# Altium PCB Player.PcbDoc (part 5 of 6)
Units mil, origin at the board's own origin, x right, y up, seen from the top; angles counter-clockwise.
Board outline 2992.13 x 3937.01 mil, 6 copper layers (Top Layer, Mid-Layer 1, Mid-Layer 2, Mid-Layer 3, Mid-Layer 4, Bottom Layer), stack 60.567 mil thick; 284 components, 323 nets, 1590 pads, 1045 vias.
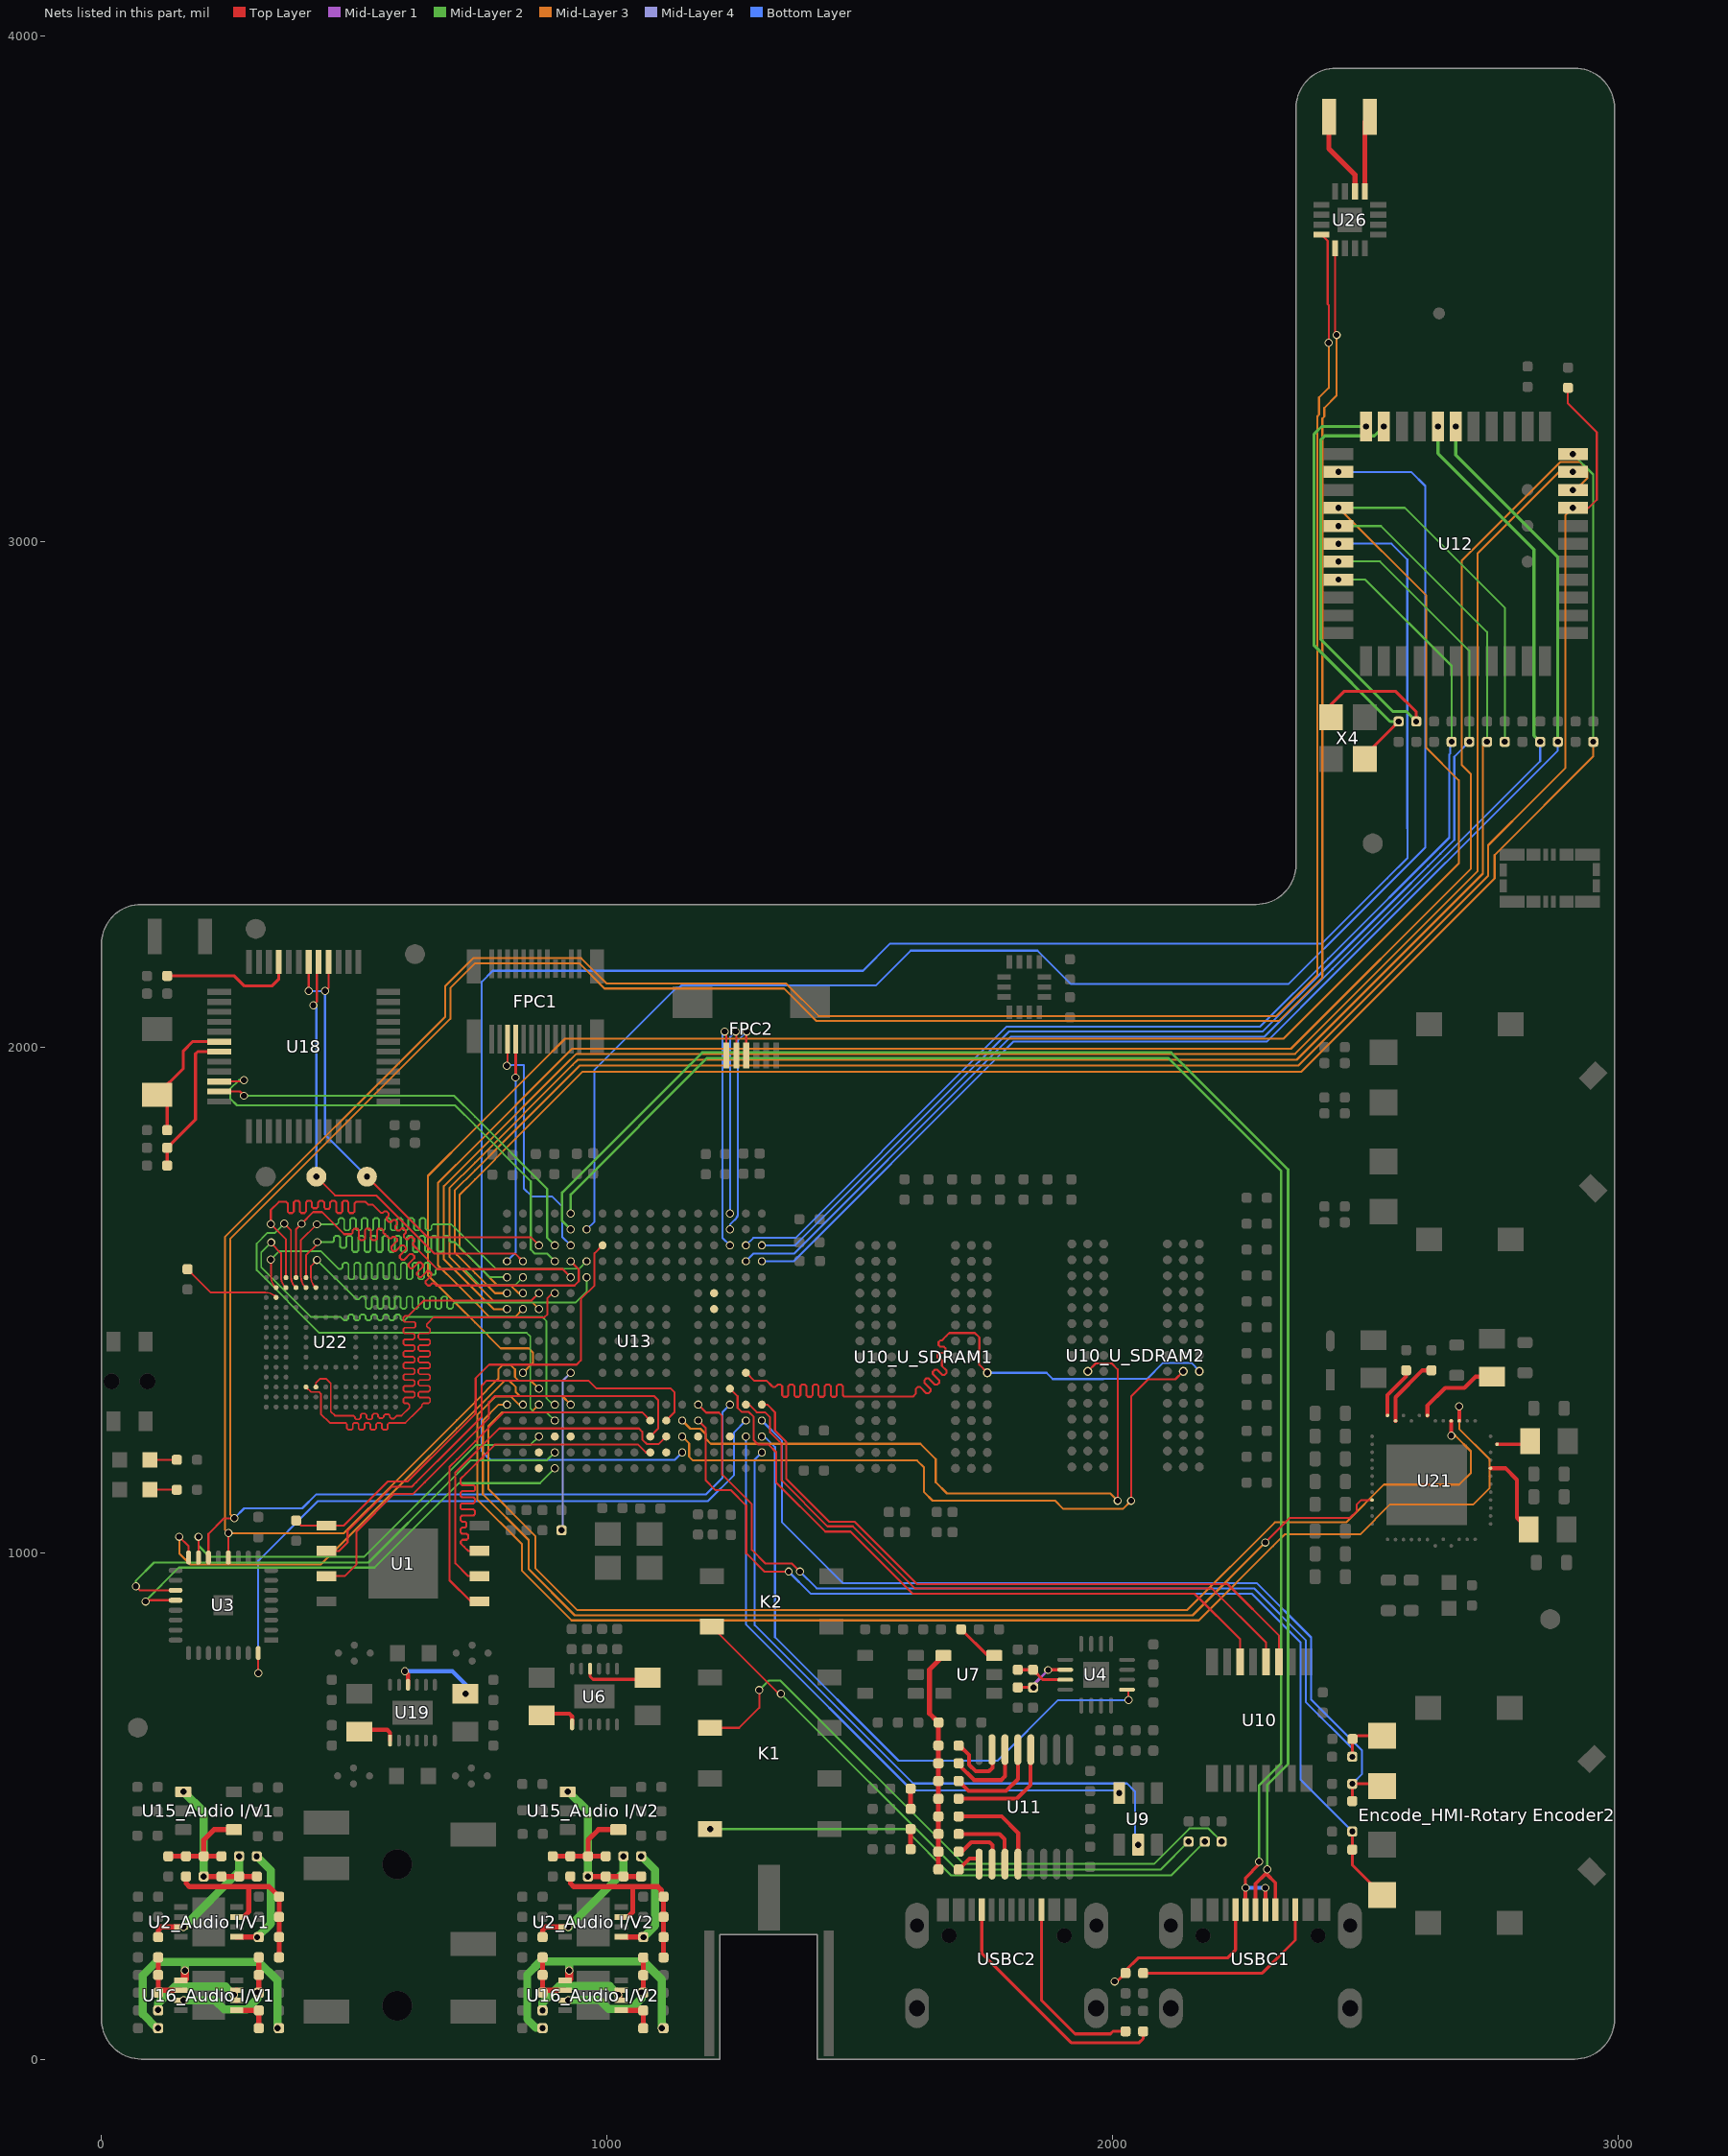
[diagram p9: the nets of this part, all layers, seen from the top]

## Via types
v1: diameter 16, hole 12, Top Layer to Bottom Layer, tented both sides, 1045 vias

## Nets (pads, with @x,y where several pads share a name; then routed paths per layer and width w, separated by ;. In a path a pad name is that pad's centre, name@x,y a point inside that pad or via, vN(x,y) a via of type N, cw(c..) or ccw(c..) an arc to the next point about the centre after c; other vN are vias at no path point) (continued)
NetC66_1: C66.1 U12.10 X4.1 | length 1027.1
  Top Layer w6: X4.1@2431.54,2653.35 2431.54,2678.54 2458,2705 2558.85,2705 2600,2663.85 v1(2600,2645)
  Mid-Layer 2 w6: v1(2536,3228.45) 2517.34,3209.79 2418.84,3209.79 2411.31,3202.26 2411.31,2807.06 2553.37,2665 2580,2665 v1(2600,2645)
NetC67_1: C67.1 U12.11 X4.3 | length 858.4
  Top Layer w6: X4.3@2498.46,2570.67 2498.46,2578.46 v1(2565,2645)
  Mid-Layer 2 w6: v1(2501,3228.45) 2413,3228.45 2398.05,3213.5 2398.05,2795.43 2548.48,2645 v1(2565,2645)
NetC70_2: C70.2 U18.6 X3.1 | length 264.9
  Top Layer w6: C70.2@130,1837.01 130,1887.05 X3.1@110,1907.05 162,1959.05 162,1994 179.85,2011.85 U18.6@232.68,2011.85
NetC71_1: C71.1 R8.2 U18.7 | length 292.6
  Top Layer w6: R8.2@130,1767.01 C71.1@130,1802.01 186,1858.01 186,1988 190.17,1992.17 U18.7@232.68,1992.17
"NetC74_Audio I/V1_1": "C74_Audio I/V1.1" "R24_Audio I/V1.2" "R25_Audio I/V1.2" "R27_Audio I/V1.1" "U15_Audio I/V1.4" | length 205.6
  Top Layer w10: 132.28,401.18 167.28,401.18 202.28,401.18 ; 237.28,401.18 202.28,401.18 ; 262.2,453.6 262.02,453.78 222.78,453.78 202.28,433.28 202.28,401.18
"NetC74_Audio I/V1_2": "C74_Audio I/V1.2" "R19_Audio I/V1.1" "R24_Audio I/V1.1" "R36_Audio I/V1.1" "U15_Audio I/V1.1" | length 290.6
  Top Layer w10: v1@202.28,361.18 307.28,361.18
  Mid-Layer 2 w16: v1(162,529) 202,489 v1@202,360
  other v1: 202,361
"NetC74_Audio I/V2_1": "C74_Audio I/V2.1" "R24_Audio I/V2.2" "R25_Audio I/V2.2" "R27_Audio I/V2.1" "U15_Audio I/V2.4" | length 205.6
  Top Layer w10: 892.28,401.18 927.28,401.18 962.28,401.18 ; 997.28,401.18 962.28,401.18 ; 1022.2,453.6 1022.02,453.78 982.78,453.78 962.28,433.28 962.28,401.18
"NetC74_Audio I/V2_2": "C74_Audio I/V2.2" "R19_Audio I/V2.1" "R24_Audio I/V2.1" "R36_Audio I/V2.1" "U15_Audio I/V2.1" | length 290.6
  Top Layer w10: v1@962.28,361.18 1067.28,361.18
  Mid-Layer 2 w16: v1@922,530 962,490 v1(962,361)
  other v1: 922,529
"NetC75_Audio I/V1_2": "C75_Audio I/V1.2" "R27_Audio I/V1.2" "R34_Audio I/V1.2" "R37_Audio I/V1.1" "R63_Audio I/V1.1" "U2_Audio I/V1.7" | length 406
  Top Layer w10: 167.28,361.18 167.28,347.72 174.14,340.86 299.9,340.86 300.03,340.98 331.48,340.98 351.28,321.18 351.28,241.18 351.28,201.18 ; 267.69,281.02 281.02,281.02 291.24,291.24 291.24,340.86
"NetC75_Audio I/V2_2": "C75_Audio I/V2.2" "R27_Audio I/V2.2" "R34_Audio I/V2.2" "R37_Audio I/V2.1" "R63_Audio I/V2.1" "U2_Audio I/V2.7" | length 412.7
  Top Layer w10: 927.28,361.18 927.28,347.72 934.14,340.86 1050.77,340.86 ; 1027.69,281.02 1041.02,281.02 1050.77,290.77 1050.77,340.86 ; 1107.28,321.04 1111.49,316.83 1111.49,241.04 1111.49,201.04 ; 1111.49,321.04 1107.28,325.25 1107.28,333.81 1100.24,340.86 1050.77,340.86
"NetC76_Audio I/V1_2": "C76_Audio I/V1.2" "R55_Audio I/V1.2" "R56_Audio I/V1.1" "U16_Audio I/V1.2" | length 116.6
  Top Layer w10: 112.28,201.18 112.28,166.18 112.28,131.18 117.12,136.02 156.87,136.02
"NetC76_Audio I/V2_2": "C76_Audio I/V2.2" "R55_Audio I/V2.2" "R56_Audio I/V2.1" "U16_Audio I/V2.2" | length 116.6
  Top Layer w10: 872.28,201.18 872.28,166.18 872.28,131.18 877.12,136.02 916.87,136.02
"NetC77_Audio I/V1_2": "C77_Audio I/V1.2" "R60_Audio I/V1.2" "U16_Audio I/V1.5" | length 78.8
  Top Layer w10: 267.69,96.65 267.93,96.42 311.05,96.42 311.28,96.18 311.28,61.18
"NetC77_Audio I/V2_2": "C77_Audio I/V2.2" "R60_Audio I/V2.2" "U16_Audio I/V2.5" | length 79
  Top Layer w10: 1027.69,96.65 1028,96.35 1071.18,96.35 1071.49,96.04 1071.49,61.04
"NetC78_Audio I/V1_2": "C78_Audio I/V1.2" "R63_Audio I/V1.2" "R65_Audio I/V1.1" "U16_Audio I/V1.3" | length 245.4
  Top Layer w10: v1(308,132) 311.28,135.28 311.28,166.18 311.28,201.18
  Mid-Layer 2 w16: v1(162.41,116.24) 224.76,116.24 243,98 286.99,98 308,119.01 v1(308,132)
"NetC78_Audio I/V2_2": "C78_Audio I/V2.2" "R63_Audio I/V2.2" "R65_Audio I/V2.1" "U16_Audio I/V2.3" | length 245.6
  Top Layer w10: v1(1068,132) 1071.49,135.49 1071.49,166.04 1071.49,201.04
  Mid-Layer 2 w16: v1(923.35,116.16) 924.47,115.04 926.43,117 985,117 1003,99 1046.99,99 1068,120.01 v1@1068,133
NetC95_1: C95.1 U22.C2 | length 197.6
  Top Layer w3.5: C95.1@170,1562.01 216.08,1515.93 324.21,1515.93 cw(c324.21,1486.85) 344.77,1507.41 U22.C2@345.32,1506.08
NetK1_2: K1.2 R59.2 | length 1260
  Top Layer w4: K1.2@1203.78,655 1261,655 1300.86,694.86 v1(1300.86,729.63)
  Mid-Layer 2 w4: v1(1300.86,729.63) 1319.84,748.62 1342.63,748.62 1704.84,386.41 2082.04,386.41 2151.63,456 2189,456 v1(2215,430)
NetK1_4: K1.4 R38.2 | length 1043.7
  Mid-Layer 2 w4: v1(1203.78,455) 1588.72,455 1680.29,363.43 2115.44,363.43 v1(2182.01,430)
NetK2_2: K2.2 R41.2 | length 1164.9
  Top Layer w4: K2.2@1206.89,855 1339.39,722.5 v1(1343.67,722.5)
  Mid-Layer 2 w4: v1(1343.67,722.5) 1691.34,374.83 2094.83,374.83 v1(2150,430)
NetL1_1: L1.1 U21.20 | length 169.8
  Top Layer w8: U21.20@2747.01,1168.5 2776.12,1168.5 2799,1145.62 2799,1070.41 L1.1@2822.4,1047.01
NetL2_1: L2.1 U21.23 | length 67.8
  Top Layer w6: U21.23@2759.8,1215.75 2818.74,1215.75 L2.1@2825,1222.01
NetL3_1: L3.1 U21.31 | length 171
  Top Layer w8: U21.31@2622.01,1272.83 2622.01,1292.01 2657.26,1327.26 2695.26,1327.26 2717.61,1349.61 L3.1@2750,1349.61
NetL4_1: L4.1 U19.1 | length 80.3
  Top Layer w8: L4.1@510,647.6 513.58,651.18 565.24,651.18 570.71,645.71 U19.1@570.71,629.88
NetL6_1: L6.1 U6.1 | length 80.3
  Top Layer w8: L6.1@870,679.61 873.58,683.19 925.24,683.19 930.71,677.72 U6.1@930.71,661.89
NetL7_1: L7.1 U6.10 | length 132.9
  Top Layer w6: U6.10@966.14,772.13 966.14,756.86 971.98,751.02 1076.61,751.02 L7.1@1080,754.41
NetL8_1: L8.1 U19.10 | length 178.8
  Top Layer w8: v1(600,767) 606.14,760.86 U19.10@606.14,740.12
  Bottom Layer w8: v1(600,767) 694,767 720,741 v1(720,722.4)
NetLED1_2: LED1.2 R10.2 | length 53
  Top Layer w4: LED1.2@96,1185 137.72,1185 R10.2@149,1185
NetLED2_2: LED2.2 R9.2 | length 53
  Top Layer w4: LED2.2@96,1126 R9.2@149,1126
NetR4_2: R4.2 U18.45 | length 268.3
  Top Layer w6: R4.2@130,2142.01 262.99,2142.01 283,2122 337,2122 350.79,2135.79 U18.45@350.79,2169.33
NetR11_1: R11.1 USBC1.A5 | length 347.2
  Top Layer w6: v1(2003.6,153.64) 2008.64,153.64 R11.1@2025,170 2025,175.04 2049.96,200 2226.54,200 2242.72,216.18 USBC1.A5@2242.72,295.45
NetR12_2: R12.2 U21.35 | length 139.8
  Top Layer w8: U21.35@2559.02,1262.01 2559.02,1308.75 2612.28,1362.01 R12.2@2630,1362.01
NetR13_2: R13.2 U21.36 | length 104.3
  Top Layer w8: U21.36@2543,1273 2543,1313 2580,1350 R13.2@2580,1362.01
NetR14_1: R14.1 USBC1.B5 | length 388
  Top Layer w6: R14.1@2060,170 2295.51,170 2360.82,235.31 USBC1.B5@2360.82,295.44
NetR15_1: R15.1 USBC2.A5 | length 496.4
  Top Layer w6: USBC2.A5@1740.79,295.45 1740.79,209.21 1917.51,32.49 2051.87,32.49 2060,40.62 R15.1@2060,55
NetR16_1: R16.1 USBC2.B5 | length 375.1
  Top Layer w6: USBC2.B5@1858.9,295.44 1858.9,116.1 1925.25,49.75 1995.02,49.75 2000.26,55 R16.1@2025,55
"NetR19_Audio I/V1_2": "R19_Audio I/V1.2" "R20_Audio I/V1.2" "U2_Audio I/V1.3" | length 246.1
  Top Layer w10: 112.28,241.18 112.28,254.89 118.73,261.34 v1@156.87,261.34
  Mid-Layer 2 w16: v1(162.24,261.45) 162.45,261.45 272,371 v1(272,401)
"NetR19_Audio I/V2_2": "R19_Audio I/V2.2" "R20_Audio I/V2.2" "U2_Audio I/V2.3" | length 247.9
  Top Layer w10: 872.28,241.18 872.28,254.89 878.73,261.34 v1@916.87,261.34
  Mid-Layer 2 w16: v1(923.21,261.16) 923.74,260.64 1032,368.89 v1@1032,402
  other v1: 1032,401
NetR26_2: R26.2 R50.1 U4.3 | length 102.2
  Top Layer w6: R50.1@1812.01,770 R26.2@1842.01,770 1861.85,750.16 U4.3@1905.98,750.16
NetR28_1: R28.1 R29.2 R30.2 R31.2 R32.2 R40.2 R42.2 R43.2 R44.2 U7.4 | length 435.8
  Top Layer w10: R28.1@1653,668 1637.49,683.51 1637.49,770.48 U7.4@1665,797.99 ; R44.2@1655,375 R31.2@1655,585 R32.2@1655,620 R28.1@1655,663
NetR29_1: R29.1 U11.4 | length 226.2
  Top Layer w8: R29.1@1695,515 1810,515 1837,542 U11.4@1837,615
NetR30_1: R30.1 U11.5 | length 193.7
  Top Layer w8: R30.1@1695,550 1714.93,530.07 1788.61,530.07 1812.21,553.66 U11.5@1812.21,612.09
NetR31_1: R31.1 U11.6 | length 162.9
  Top Layer w8: R31.1@1695,585 1695,582.63 1725.84,551.79 1779.34,551.79 1787,559.45 U11.6@1787,612
NetR32_1: R32.1 U11.7 | length 132.3
  Top Layer w8: R32.1@1695,620 1697,620 1715.68,601.32 1715.68,582.09 1728.78,569 1755,569 1762,576 U11.7@1762,606
"NetR34_Audio I/V1_1": "R34_Audio I/V1.1" "R36_Audio I/V1.2" "U2_Audio I/V1.5" | length 223.4
  Top Layer w10: 267.69,241.65 306.81,241.65 307.28,241.18 307.82,241.18 v1(308,241)
  Mid-Layer 2 w16: v1(307,401) 335,373 335,268 v1(308,241)
"NetR34_Audio I/V2_1": "R34_Audio I/V2.1" "R36_Audio I/V2.2" "U2_Audio I/V2.5" | length 226.8
  Top Layer w10: 1027.69,241.65 1028,241.35 1071.18,241.35 1071.49,241.04 1071.89,241.04 v1(1071.98,240.95)
  Mid-Layer 2 w16: v1@1067,402 1095,374 1095,263.97 v1(1071.98,240.95)
  other v1: 1067,401
NetR39_1: R39.1 R58.2 | length 40
  Top Layer w10: R39.1@1600,415 R58.2@1600,455
NetR40_1: R40.1 U11.12 | length 182.7
  Top Layer w8: R40.1@1695,480 1780,480 1813,447 U11.12@1813,396
NetR42_1: R42.1 U11.11 | length 134.1
  Top Layer w8: R42.1@1695,445 1776,445 1786,435 U11.11@1786,396
NetR43_1: R43.1 U11.10 | length 105.4
  Top Layer w8: R43.1@1695,410 1701,410 1720,429 1756,429 1762,423 U11.10@1762,395
NetR44_1: R44.1 U11.9 | length 58.3
  Top Layer w8: R44.1@1695,375 1716.47,396.47 1732.4,396.47 1735.43,393.43 U11.9@1735.43,385.71
NetR45_1: R45.1 U7.3 | length 86.9
  Top Layer w6: R45.1@1700,850 1752.01,797.99 U7.3@1765.39,797.99
NetR51_1: R51.1 R52.2 U4.2 | length 110.5
  Top Layer w6: R51.1@1812.01,735 R52.2@1842.01,735 ; v1(1872.13,769.41) 1872.57,769.84 U4.2@1905.98,769.84
  Mid-Layer 1 w6: v1(1843,735) 1843,740.27 v1(1872.13,769.41)
"NetR57_Audio I/V1_1": "R57_Audio I/V1.1" "R60_Audio I/V1.1" "U16_Audio I/V1.1" | length 539.9
  Top Layer w16: 164.72,158.51 165,158.79 v1(165,175)
  Mid-Layer 2 w16: v1(112,61) 109.9,61 82,88.9 82,166 108,192 312,192 348,156 v1@348,60 ; v1(165,175) 165,192
  other v1: 348,61
"NetR57_Audio I/V2_1": "R57_Audio I/V2.1" "R60_Audio I/V2.1" "U16_Audio I/V2.1" | length 546.3
  Top Layer w16: 924.72,158.51 925,158.79 v1(925,175)
  Mid-Layer 2 w16: v1@872,62 859,62 842,79 842,167 868,193 1072,193 1108,157 v1(1108,61) ; v1@925,176 925,193
  other v1: 872.28,61.18
"NetR61_Audio I/V1_2": "R61_Audio I/V1.2" "U16_Audio I/V1.6" "U16_Audio I/V1.7" | length 208.5
  Top Layer w10: 267.69,116.34 262,122.03 v1(262,127) 262,130.33 267.69,136.02
  Mid-Layer 2 w16: v1(112,97) 112,110.6 144.96,143.55 245.45,143.55 v1(262,127)
"NetR61_Audio I/V2_2": "R61_Audio I/V2.2" "U16_Audio I/V2.6" "U16_Audio I/V2.7" | length 203.8
  Top Layer w4: 1027.69,116.34 1027.69,136.02
  Mid-Layer 2 w16: v1@872,98 872,111.6 904.96,144.55 1005.45,144.55 v1@1022,128
  other v1: 872.28,96.18 1022,127
NetR62_1: R62.1 R64.2 | length 40
  Top Layer w10: R62.1@1600,495 R64.2@1600,535
NetSPK+_1: SPK+.1 U26.9 | length 152
  Top Layer w10: U26.9@2498.43,3693.27 2498.43,3830.91 SPK+.1@2508.58,3841.06
NetSPK-_1: SPK-.1 U26.10 | length 169.1
  Top Layer w10: SPK-.1@2427.32,3841.06 2427.32,3777.68 2478.74,3726.26 U26.10@2478.74,3693.27
PA0: "C1_HMI-Rotary Encoder2.1" "Encode_HMI-Rotary Encoder2.A" "R12_HMI-Rotary Encoder2.1" U13.N5 | length 1882.3
  Top Layer w4: v1(1179.92,1294.17) 1195.7,1278.39 1220.89,1278.39 1227.45,1271.83 1227.45,1155.89 1286.23,1097.11 1286.23,1006.77 1312.94,980.06 1364.94,980.06 v1(1381,964)
  Top Layer w6: v1(2473.64,597.8) 2473.86,598.01 2473.86,632.77 2474.08,632.98 2475.7,631.36 2483.83,639.49 2532.75,639.49
  Bottom Layer w4: v1(1381,964) 1414.16,930.84 2230.71,930.84 2279.16,930.84 2381.47,828.53 2381.47,706.53 2473.64,614.36 v1(2473.64,597.8)
PA1: "C2_HMI-Rotary Encoder2.1" "Encode_HMI-Rotary Encoder2.B" "R13_HMI-Rotary Encoder2.1" U13.N4 | length 2055.5
  Top Layer w4: v1(1179.92,1262.68) 1195,1247.6 1195,1144 1213.67,1125.33 1244.33,1125.33 1275.02,1094.64 1275.02,1000.27 1311.28,964 v1(1359,964)
  Top Layer w6: v1(2473.64,450) 2473.54,449.91 2473.54,414.35 2473.45,414.26 2473.64,414.07 2473.64,383.64 2532.75,324.53
  Bottom Layer w4: v1(1359,964) 1402.44,920.56 2230.71,920.56 2230.71,920.42 2274.58,920.42 2371.3,823.7 2371.3,552.34 v1(2473.64,450)
PA2: U13.N3
PA3: U9.5 U13.U2 | length 1343.4
  Bottom Layer w4: v1(1305.91,1199.68) 1292,1185.78 1292,858 1605,545 2028,545 2044,529 2044,429.82 v1(2050,423.82)
PA4: U4.9 U13.U3 | length 1282.2
  Top Layer w4: U4.9@2028.03,730.47 2031,727.5 v1(2031,710)
  Bottom Layer w4: v1(1305.91,1231.18) 1310.82,1231.18 1332,1210 1332,915 1332,834.16 1576.16,590 1772,590 1892,710 v1(2031,710)
PA5: U9.3 U13.T3 | length 1247.8
  Bottom Layer w4: v1(1274.41,1231.18) 1274.41,915 1274.41,859.74 1602.79,531.36 2007.42,531.36 v1(2012.6,526.18)
PA6: U13.R3
PA7: U3.14 U13.R5 U26.1 | length 5775.1
  Top Layer w4: U3.14@211.55,992.01 211.55,1038.55 242.47,1069.47 v1(262.64,1069.47) ; U26.1@2439.37,3581.06 2439.37,3412.52 v1(2442.44,3409.44)
  Mid-Layer 3 w4: v1(262.64,1069.47) 254.48,1077.62 254.48,1621.48 690,2057 690,2118.14 738.86,2167 944.7,2167 994.7,2117 1349.7,2117 1413.98,2052.72 2328.02,2052.72 2414.38,2139.08 2414.38,3244.19 2418.13,3247.93 2418.13,3264.9 2442.44,3289.22 v1(2442.44,3409.44)
  Bottom Layer w4: v1(262.64,1069.47) 282.17,1089 397.06,1089 425,1116.94 1195.94,1116.94 1228.13,1149.13 1228.13,1279.39 v1(1242.91,1294.17)
PA8: FPC1.3 U13.E15 | length 506.3
  Top Layer w4: v1(801.55,1964.35) 803.02,1965.83 803.27,1966.08 FPC1.3@803.27,2017.01
  Bottom Layer w4: v1(801.55,1964.35) 803.02,1965.83 803.19,1966 835,1966 835,1722 851,1706 891,1706 911,1686 911,1626.09 v1(927.95,1609.13)
PA9: U13.D15 U18.11 | length 846.4
  Top Layer w4: U18.11@232.68,1913.43 273.57,1913.43 v1(282,1905)
  Mid-Layer 2 w4: v1(282,1905) 697.2,1905 738.71,1863.49 881.38,1720.81 881.38,1624.21 v1(896.46,1609.13)
PA10: U13.D14 U18.10 | length 958.8
  Top Layer w4: U18.10@232.68,1933.11 279.11,1933.11 v1(282,1936)
  Mid-Layer 2 w4: v1(282,1936) 272,1936 254.51,1918.51 254.51,1899.49 268.08,1885.92 699.08,1885.92 738.71,1846.29 849.07,1735.93 849.07,1600.58 856.85,1592.8 881.3,1592.8 v1(896.46,1577.64)
PA11: U13.E17 USBC1.A7 USBC1.B7 | length 3219.6
  Top Layer w6: v1(2262.4,338.74) 2262.4,358.28 2289.44,385.33 v1(2289.44,390.56)
  Top Layer w7.28: USBC1.B7@2262.4,295.44 v1(2262.4,338.74) ; USBC1.A7@2301.77,295.38 v1(2301.77,338.74)
  Mid-Layer 2 w5: v1(927.95,1672.13) 927.95,1709.77 1197.91,1979.73 2109.27,1979.73 2123.17,1965.83 2230.71,1858.29 2332.9,1756.1 2332.9,584.9 2289.44,541.44 v1(2289.44,390.56)
  Bottom Layer w7.28: v1(2262.4,338.74) v1(2301.77,338.74)
PA12: U13.E16 USBC1.A6 USBC1.B6 | length 3288.9
  Top Layer w7.28: USBC1.A6@2282.08,295.44 2282.08,346.86 v1@2302.68,367.45 ; v1@2304.53,369.3 2304.53,365.59 2321.45,348.67 USBC1.B6@2321.45,295.44
  Mid-Layer 2 w5: v1(927.95,1640.63) 911,1657.58 911,1713.38 1163.44,1965.83 1188.35,1990.73 2114.96,1990.73 2139.86,1965.83 2230.71,1874.98 2346.53,1759.16 2346.53,583.35 2343.9,580.72 2343.9,580.35 2305,541.44 v1(2305,375)
PA13: TP2.1 U13.C15 U18.40 U18.42 | length 947.3
  Top Layer w4: U18.42@409.84,2169.33 409.84,2112.16 v1(410,2112) ; v1(442,2112) 449.21,2119.21 U18.40@449.21,2169.33 ; v1(525,1745) 564.17,1705.83 644.67,1625.33 702.72,1625.33 738.71,1625.33 848.77,1625.33 v1(864.96,1609.13)
  Bottom Layer w4: v1(410,2112) v1(442,2112) 442,1828 v1(525,1745)
PA14: TP3.1 U13.B14 U18.41 | length 909
  Top Layer w4: v1(419,2084) 426.06,2091.06 426.06,2165.87 U18.41@429.53,2169.33 ; v1(425,1745) 462,1708 543,1708 545.17,1705.83 657.99,1593.01 702.72,1593.01 738.71,1593.01 818.09,1593.01 v1(833.46,1577.64)
  Bottom Layer w4: v1(419,2084) 425,2078 v1(425,1745)
PA15: FPC1.4 U13.A14 | length 446.4
  Top Layer w6: v1(819,1941) FPC1.4@819,2016.98
  Bottom Layer w4: v1(801.97,1577.64) 819,1594.67 v1(819,1941)
PB0: U10.11 U13.U5 | length 1328
  Top Layer w4: U13.U5@1305.91,1294.17 1316.63,1294.17 1332.02,1278.79 1332.02,1242.9 1354,1220.92 1354,1148 1439.39,1062.61 1489.39,1062.61 1612.66,939.34 2227.05,939.34 2328.39,838 U10.11@2328.39,785.16
PB1: U10.12 U13.T5 | length 1321.6
  Top Layer w4: U13.T5@1274.41,1294.17 1280.83,1294.17 1296,1279 1312,1279 1322.35,1268.65 1322.35,1239.24 1345,1216.59 1345,1144.27 1435.67,1053.61 1485.67,1053.61 1608.93,930.34 2196.46,930.34 2302.8,824 U10.12@2302.8,785.16
PB2: U10.14 U13.R6 | length 1334.6
  Top Layer w4: U13.R6@1242.91,1325.67 1258,1310.58 1258,1287.68 1266.2,1279.48 1280.2,1279.48 1290,1269.68 1290,1223.86 1298.86,1215 1319.39,1215 1334.39,1200 1334.39,1139.88 1431.27,1043 1481.27,1043 1603.93,920.34 2161.66,920.34 2251.61,830.39 U10.14@2251.61,785.16
PB3: U3.12 U13.C6 U26.16 | length 5412.1
  Top Layer w4: U3.12@250.93,992.01 250.93,1039.93 v1(251,1040) ; U26.16@2412.8,3607.64 2424.87,3595.56 2424.87,3470.45 2426.89,3468.43 v1(2426.89,3393.89)
  Mid-Layer 3 w4: v1(864.96,1325.67) 849.43,1341.2 825.35,1341.2 817.77,1348.78 817.77,1363.81 808.55,1373.03 794.03,1373.03 784.88,1363.87 784.88,1345.43 738.71,1299.26 702.72,1263.27 580.27,1140.83 479.45,1040 v1(251,1040) 244.16,1046.84 244.16,1625.75 680,2061.59 680,2122.28 734.72,2177 948.84,2177 998.84,2127 1353.84,2127 1418.12,2062.72 2323.88,2062.72 2404.38,2143.23 2404.38,3248.33 2407.81,3251.76 2407.81,3285.7 2426.89,3304.77 v1(2426.89,3393.89)
PB4: R23.2 U12.15 U13.B7 | length 4288.1
  Mid-Layer 2 w4: v1(2446.13,3067.58) 2577.42,3067.58 2775,2870 v1(2775,2605)
  Mid-Layer 3 w4: v1(833.46,1357.17) 853.15,1376.85 853.15,1397.52 845.09,1405.57 789.51,1405.57 738.71,1456.38 702.72,1492.37 645.54,1549.54 645.54,1705.83 645.54,1746.48 738.71,1839.65 864.89,1965.83 916.89,2017.83 2337.83,2017.83 2684,2364 2684,2528.88 2620,2592.88 2620,2893.71 v1(2446.13,3067.58)
PB5: U13.A5 U21.45 | length 2199.8
  Top Layer w4: v1(2301.73,1021.65) 2350.12,1070.05 2468.8,1070.05 2482,1083.25 2482,1096 2491.51,1105.51 U21.45@2512.76,1105.51
  Mid-Layer 3 w4: v1(801.97,1294.17) 785.72,1294.17 754.27,1262.73 754.27,1117 844.77,1026.5 844.77,968.77 935.91,877.63 2157.71,877.63 v1(2301.73,1021.65)
PB6: U13.B5 U21.27 | length 2734.8
  Top Layer w8: U21.27@2685,1262.01 v1@2685,1290.96
  Mid-Layer 3 w4: v1(833.46,1294.17) 825.64,1294.17 809.89,1309.92 779.19,1309.92 743.14,1273.86 743.14,1107 831.22,1018.92 831.22,966.22 929.8,867.63 2170.01,867.63 2316.73,1014.35 2340,1037.62 2489.07,1037.62 2548.44,1097 2713,1097 2745.17,1129.17 2745.17,1185.83 2684.91,1246.09 2684.91,1290.92 v1(2684.97,1290.99)
PB7: U13.C5 U21.28 | length 2557.8
  Top Layer w8: v1(2669.24,1232.82) U21.28@2669.25,1262.01
  Mid-Layer 3 w4: v1(864.96,1294.17) 849.79,1279 792,1279 765,1252 765,1127.22 858.35,1033.87 858.35,970.22 940.94,887.63 2146.49,887.63 2320.29,1061.42 2461.42,1061.42 2536,1136 2685,1136 2708,1159 2708,1201.98 2677.16,1232.82 v1(2669.24,1232.82)
PB8: U13.D5 U22.B3 | length 1020.6
  Top Layer w3.5: v1(335.5,1614.82) 335.5,1613.13 355.14,1593.49 355.14,1546.86 ccw(c384.21,1546.86) 363.66,1526.3 U22.B3@365,1525.75
  Mid-Layer 2 w3.5: v1(335.5,1614.82) 316,1595.32 316,1566 414.46,1467.54 450.44,1467.54 473.5,1467.54 476.37,1464.66 476.37,1464.11 479.25,1461.23 485,1461.23 487.87,1464.11 487.87,1469.21 490.75,1472.08 496.5,1472.08 499.37,1469.21 499.37,1464.11 502.25,1461.23 508,1461.23 510.87,1464.11 510.87,1469.21 513.75,1472.08 519.5,1472.08 522.37,1469.21 522.37,1464.11 525.25,1461.23 531,1461.23 533.87,1464.11 533.87,1469.21 536.75,1472.08 542.5,1472.08 545.37,1469.21 545.37,1464.11 548.25,1461.23 554,1461.23 556.87,1464.11 556.87,1469.21 559.75,1472.08 565.5,1472.08 568.37,1469.21 568.37,1464.11 571.25,1461.23 577,1461.23 579.87,1464.11 579.87,1469.21 582.75,1472.08 588.5,1472.08 591.37,1469.21 591.37,1464.11 594.25,1461.23 600,1461.23 602.87,1464.11 602.87,1464.66 605.75,1467.54 607.5,1467.54 872.01,1467.54 879.92,1459.63 879.92,1306.77 892.52,1294.17 v1(896.46,1294.17)
PB9: U13.D4 U22.B4 | length 1054.6
  Top Layer w3.5: v1(361.64,1652.08) 374.83,1638.88 374.83,1546.86 ccw(c403.9,1546.86) 383.35,1526.3 U22.B4@384.69,1525.75
  Mid-Layer 2 w3.5: v1(361.64,1652.08) 343.46,1633.89 328.07,1633.89 306.98,1612.8 306.98,1559.87 430.85,1436 841,1436 848.11,1428.89 848.11,1286.85 856.19,1278.76 880.37,1278.76 v1(896.46,1262.68)
PB10: U13.P11
PB11: U13.P12
PB12: R47.2 U12.7 U13.T14 | length 2725.7
  Mid-Layer 2 w6: v1(2643,3228.45) 2643,3175 2832.85,2985.15 2832.85,2617.15 v1(2845,2605)
  Bottom Layer w4: v1(1274.41,1577.64) 1289.5,1592.73 1369.59,1592.73 1742.68,1965.83 1746.83,1969.97 1798.7,2021.84 1801.95,2021.84 2300.17,2021.84 2434.3,2155.98 2845,2566.68 v1(2845,2605)
PB13: R35.2 U12.6 U13.U14 | length 2717
  Mid-Layer 2 w6: v1(2678,3228.45) 2678,3172 2880,2970 v1(2880,2605)
  Bottom Layer w4: v1(1305.91,1577.64) 1368.64,1577.64 1756.83,1965.83 1802.84,2011.84 2304.31,2011.84 2438.44,2145.98 2880,2587.53 v1(2880,2605)
PB14: R18.2 U12.18 U13.U15 | length 2419.9
  Mid-Layer 2 w4: v1(2446.13,2961.58) 2528.54,2961.58 2705,2785.12 v1(2705,2605)
  Bottom Layer w4: v1(1305.91,1609.13) 1371.85,1609.13 1728.54,1965.83 1736.83,1974.11 1794.56,2031.84 1797.81,2031.84 2296.03,2031.84 2430.16,2165.98 2559.16,2294.98 2623.02,2358.84 2647.81,2383.63 2671.64,2407.46 2675.28,2411.1 2675.28,2422.7 2675.28,2575.28 v1(2705,2605)
PB15: R21.2 U12.19 U13.T15 | length 2361
  Mid-Layer 2 w4: v1(2446.13,2925.58) 2499.42,2925.58 2670,2755 v1(2670,2605)
  Bottom Layer w4: v1(1274.41,1609.13) 1289.28,1624 1372.57,1624 1714.4,1965.83 1726.83,1978.25 1790.42,2041.84 1793.67,2041.84 2291.63,2041.84 2425.76,2175.98 2426.02,2175.98 2665.28,2415.24 2665.28,2579.43 2667,2581.14 2667,2602 v1(2670,2605)
PC0: U13.L2
PC1: U12.17 U13.M2 | length 4009.8
  Bottom Layer w4: v1(1148.43,1199.68) 1133.74,1185 769,1185 752,1202 752,2130.42 773.58,2152 1506,2152 1559.98,2205.98 2413.59,2205.98 2542.59,2334.98 2583.02,2375.41 2583.02,2432.59 2582.23,2433.39 2582.23,2965.35 2551,2996.58 v1(2446.13,2996.58)
PC2: U10_U_SDRAM2.J8 U13.M3 | length 1327.6
  Top Layer w4: v1(2036.22,1104.21) 2036.22,1310.34 2070.06,1344.18 2123.64,1344.18 v1(2139.45,1359.99)
  Mid-Layer 3 w4: v1(1148.43,1231.18) 1162.17,1217.43 1162.17,1191.36 1169.71,1183.83 1612.72,1183.83 1626.71,1169.84 1626.71,1121.21 1643.71,1104.21 1885.71,1104.21 1902.09,1087.83 2019.83,1087.83 v1(2036.22,1104.21)
PC3: U10_U_SDRAM2.J2 U13.M4 | length 1289.4
  Top Layer w4: v1(1950.47,1359.99) 1966.21,1375.73 1997.97,1375.73 2009.65,1364.05 v1(2009.65,1104.21)
  Mid-Layer 3 w4: v1(1148.43,1262.68) 1164.61,1246.49 1184.43,1246.49 1194.79,1236.13 1194.79,1226.83 1205,1216.61 1619.55,1216.61 1649.71,1186.45 1649.71,1140.8 1672.02,1118.48 1995.37,1118.48 v1(2009.65,1104.21)
PC4: U3.32 U13.T4 | length 1390.9
  Top Layer w4: v1(310,763) U3.32@310,803.01
  Bottom Layer w4: v1(310,763) 310,985.24 428.43,1103.67 738.71,1103.67 1199.67,1103.67 1251,1155 1251,1239.27 v1(1274.41,1262.68)
PC5: "C3_HMI-Rotary Encoder2.1" "Encode_HMI-Rotary Encoder2.S" "R15_HMI-Rotary Encoder2.1" U13.U4 | length 1792.5
  Top Layer w6: 2473.45,510.14 2473.55,510.23 2473.55,544.16 2473.64,544.25 2528.58,544.25 2532.75,540.08
  Bottom Layer w4: v1(1305.91,1262.68) 1346,1222.58 1346,1061.29 1466.01,941.29 2230.71,941.29 2284.71,941.29 2392,834 2392,711.03 2493,610.03 2493,563.87 v1(2473.64,544.51)
PC6: U13.F14 U22.B5 | length 1044
  Top Layer w3.5: U22.B5@404.36,1525.75 403.03,1526.3 cw(c423.58,1546.86) 394.51,1546.86 394.51,1619.48 v1(425.8,1650.76)
  Mid-Layer 2 w3.5: v1(425.8,1650.76) 464,1650.76 465.75,1650.76 468.63,1653.64 468.63,1659.89 471.5,1662.76 477.25,1662.76 480.13,1659.89 480.13,1641.64 483,1638.76 488.75,1638.76 491.63,1641.64 491.63,1659.89 494.5,1662.76 500.25,1662.76 503.13,1659.89 503.13,1641.64 506,1638.76 511.75,1638.76 514.63,1641.64 514.63,1659.89 517.5,1662.76 523.25,1662.76 526.13,1659.89 526.13,1641.64 529,1638.76 534.75,1638.76 537.63,1641.64 537.63,1659.89 540.5,1662.76 546.25,1662.76 549.13,1659.89 549.13,1641.64 552,1638.76 557.75,1638.76 560.63,1641.64 560.63,1659.89 563.5,1662.76 569.25,1662.76 572.13,1659.89 572.13,1641.64 575,1638.76 580.75,1638.76 583.63,1641.64 583.63,1659.89 586.5,1662.76 592.25,1662.76 595.13,1659.89 595.13,1641.64 598,1638.76 603.75,1638.76 606.63,1641.64 606.63,1659.89 609.5,1662.76 615.25,1662.76 618.13,1659.89 618.13,1641.64 621,1638.76 626.75,1638.76 629.63,1641.64 629.63,1659.89 632.5,1662.76 638.25,1662.76 641.13,1659.89 641.13,1641.64 644,1638.76 649.75,1638.76 652.63,1641.64 652.63,1647.89 655.5,1650.76 660,1650.76 691.63,1650.76 702.72,1639.68 738.71,1603.69 779.4,1563 944.81,1563 v1(959.45,1577.64)
PC7: U13.F13 U22.B6 | length 986.1
  Top Layer w3.5: U22.B6@424.06,1525.75 422.72,1526.3 cw(c443.27,1546.86) 414.2,1546.86 414.2,1568.22 v1(426.36,1580.38)
  Mid-Layer 2 w3.5: v1(426.36,1580.38) 502.64,1504.11 504.44,1502.3 508.51,1502.3 514.2,1508 519.95,1508 522.83,1505.12 522.83,1486.88 525.7,1484 531.45,1484 534.33,1486.88 534.33,1505.12 537.2,1508 542.95,1508 545.83,1505.12 545.83,1486.88 548.7,1484 554.45,1484 557.33,1486.88 557.33,1505.12 560.2,1508 565.95,1508 568.83,1505.12 568.83,1486.88 571.7,1484 577.45,1484 580.33,1486.88 580.33,1505.12 583.2,1508 588.95,1508 591.83,1505.12 591.83,1486.88 594.7,1484 600.45,1484 603.33,1486.88 603.33,1505.12 606.2,1508 611.95,1508 614.83,1505.12 614.83,1486.88 617.7,1484 623.45,1484 626.33,1486.88 626.33,1505.12 629.2,1508 634.95,1508 637.83,1505.12 637.83,1486.88 640.7,1484 646.45,1484 649.33,1486.88 649.33,1505.12 652.2,1508 657.95,1508 660.83,1505.12 660.83,1486.88 663.7,1484 669.45,1484 672.33,1486.88 672.33,1505.12 675.2,1508 680.95,1508 683.83,1505.12 683.83,1486.88 686.7,1484 692.45,1484 695.33,1486.88 695.33,1493.12 698.2,1496 702.72,1496 937.57,1496 959.45,1517.88 v1(959.45,1546.14)
PC8: U13.E13 U22.A3 | length 1077.4
  Top Layer w4: U22.A3@365,1545.44 365,1621.17 v1(334.86,1651.31) 334.86,1679.11 350.75,1695 351.34,1695 365.34,1695 368.34,1692 368.34,1676.11 371.34,1673.11 377.34,1673.11 380.34,1676.11 380.34,1694.11 383.34,1697.11 389.34,1697.11 392.34,1694.11 392.34,1676.11 395.34,1673.11 401.34,1673.11 404.34,1676.11 404.34,1694.11 407.34,1697.11 413.34,1697.11 416.34,1694.11 416.34,1685.45 419.34,1682.45 425.34,1682.45 428.34,1685.45 428.34,1694.11 431.34,1697.11 437.34,1697.11 440.34,1694.11 440.34,1684.2 443.34,1681.2 449.34,1681.2 452.34,1684.2 452.34,1694.11 455.34,1697.11 461.34,1697.11 464.34,1694.11 464.34,1676.11 467.34,1673.11 473.34,1673.11 476.34,1676.11 476.34,1694.11 479.34,1697.11 485.34,1697.11 488.34,1694.11 488.34,1676.11 491.34,1673.11 497.34,1673.11 500.34,1676.11 500.34,1692 503.34,1695 522.2,1695 527.31,1689.89 536.26,1689.89 551.08,1675.08 552.49,1673.66 556.73,1673.66 559.61,1676.54 563.85,1676.54 568.1,1672.3 568.1,1668.05 563.96,1663.92 563.96,1659.67 568.2,1655.43 572.44,1655.43 576.58,1659.57 580.82,1659.57 585.07,1655.33 585.07,1651.08 580.93,1646.95 580.93,1642.7 585.17,1638.46 589.41,1638.46 593.55,1642.6 597.79,1642.6 602.04,1638.36 602.04,1634.11 597.9,1629.97 597.9,1625.73 602.14,1621.49 606.38,1621.49 610.52,1625.63 614.77,1625.63 619.01,1621.39 619.01,1617.14 616.13,1614.26 616.13,1610.02 631.58,1594.58 664.15,1562 912.09,1562 v1(927.95,1546.14)
PC9: U13.E14 U22.A4 | length 1055
  Top Layer w4: U22.A4@384.69,1545.44 384.69,1582.02 384.69,1641.03 v1(395.3,1651.64) 418.61,1674.95 436.2,1674.95 479.8,1631.35 492,1631.35 494,1631.35 497,1634.35 497,1639.17 500,1642.17 506,1642.17 509,1639.17 509,1622.35 512,1619.35 518,1619.35 521,1622.35 521,1639.17 524,1642.17 530,1642.17 533,1639.17 533,1622.35 536,1619.35 542,1619.35 545,1622.35 545,1639.17 548,1642.17 554,1642.17 557,1639.17 557,1634.35 560,1631.35 560.63,1631.35 564.92,1627.06 567.49,1624.49 568.9,1623.08 573.15,1623.08 576.21,1626.14 580.45,1626.14 584.7,1621.9 584.7,1617.65 573.15,1606.1 573.15,1601.86 577.39,1597.62 581.63,1597.62 593.18,1609.17 597.42,1609.17 601.67,1604.93 601.67,1600.68 590.12,1589.13 590.12,1584.89 594.36,1580.65 598.6,1580.65 610.15,1592.2 614.39,1592.2 618.64,1587.95 618.64,1583.71 607.09,1572.16 607.09,1567.92 611.33,1563.68 615.57,1563.68 627.12,1575.23 631.36,1575.23 635.61,1570.98 635.61,1566.74 624.06,1555.19 624.06,1550.95 628.3,1546.71 632.54,1546.71 644.09,1558.26 648.34,1558.26 652.58,1554.01 652.58,1549.77 641.03,1538.22 641.03,1533.98 645.27,1529.74 649.51,1529.74 653.76,1533.98 658,1533.98 662.15,1529.83 678.83,1529.83 702.72,1529.83 738.71,1529.83 935.45,1529.83 943.99,1538.38 943.99,1561.6 v1(927.95,1577.64)
PC10: U13.A13 U22.A5 | length 985.6
  Top Layer w4: U22.A5@404.37,1545.44 404.37,1589.2 426.66,1611.48 v1(426.66,1615.59)
  Mid-Layer 2 w4: v1(426.66,1615.59) 455,1615.59 457,1615.59 460,1618.59 460,1624.59 463,1627.59 469,1627.59 472,1624.59 472,1607 475,1604 481,1604 484,1607 484,1624.59 487,1627.59 493,1627.59 496,1624.59 496,1599.26 499,1596.26 505,1596.26 508,1599.26 508,1624.59 511,1627.59 517,1627.59 520,1624.59 520,1599.26 523,1596.26 529,1596.26 532,1599.26 532,1624.59 535,1627.59 541,1627.59 544,1624.59 544,1599.26 547,1596.26 553,1596.26 556,1599.26 556,1624.59 559,1627.59 565,1627.59 568,1624.59 568,1599.26 571,1596.26 577,1596.26 580,1599.26 580,1624.59 583,1627.59 589,1627.59 592,1624.59 592,1599.26 595,1596.26 601,1596.26 604,1599.26 604,1624.59 607,1627.59 613,1627.59 616,1624.59 616,1599.26 619,1596.26 625,1596.26 628,1599.26 628,1624.59 631,1627.59 637,1627.59 640,1624.59 640,1599.26 643,1596.26 649,1596.26 652,1599.26 652,1624.59 655,1627.59 661,1627.59 664,1624.59 664,1599.26 667,1596.26 673,1596.26 676,1599.26 676,1624.59 679,1627.59 685,1627.59 688,1624.59 688,1618.59 691,1615.59 698.41,1615.59 702.72,1611.28 767.86,1546.14 v1(801.97,1546.14)
PC11: U13.B13 U22.B2 | length 1044.6
  Top Layer w3.5: v1(335,1581) 335.46,1580.54 335.46,1546.86 ccw(c364.54,1546.86) 343.98,1526.3 U22.B2@345.32,1525.75
  Mid-Layer 2 w3.5: v1(335,1581) 351.69,1597.69 433.83,1597.69 468.88,1562.64 472.4,1562.64 474.16,1562.64 477.03,1565.52 477.03,1571.77 479.91,1574.64 485.66,1574.64 488.53,1571.77 488.53,1544.98 491.41,1542.11 497.16,1542.11 500.03,1544.98 500.03,1571.77 502.91,1574.64 508.66,1574.64 511.53,1571.77 511.53,1544.98 514.41,1542.11 520.16,1542.11 523.03,1544.98 523.03,1571.77 525.91,1574.64 531.66,1574.64 534.53,1571.77 534.53,1544.98 537.41,1542.11 543.16,1542.11 546.03,1544.98 546.03,1571.77 548.91,1574.64 554.66,1574.64 557.53,1571.77 557.53,1544.98 560.41,1542.11 566.16,1542.11 569.03,1544.98 569.03,1571.77 571.91,1574.64 577.66,1574.64 580.53,1571.77 580.53,1544.98 583.41,1542.11 589.16,1542.11 592.03,1544.98 592.03,1571.77 594.91,1574.64 600.66,1574.64 603.53,1571.77 603.53,1544.98 606.41,1542.11 612.16,1542.11 615.03,1544.98 615.03,1571.77 617.91,1574.64 623.66,1574.64 626.53,1571.77 626.53,1544.98 629.41,1542.11 635.16,1542.11 638.03,1544.98 638.03,1571.77 640.91,1574.64 646.66,1574.64 649.53,1571.77 649.53,1553.72 652.41,1550.84 658.16,1550.84 661.03,1553.72 661.03,1559.77 663.91,1562.64 687.39,1562.64 716.36,1562.64 749,1530 817.32,1530 v1(833.46,1546.14)
PC12: U13.C12 U22.M6 | length 1058.8
  Top Layer w3.5: U22.M6@424.06,1328.9 424.06,1337.25 431.81,1345 445,1345 453.47,1336.53 453.47,1280.53 461.6,1272.4 485,1272.4 498.25,1272.4 501.13,1269.53 501.13,1268.01 504,1265.13 509.75,1265.13 512.63,1268.01 512.63,1273.63 515.5,1276.51 521.25,1276.51 524.13,1273.63 524.13,1268.01 527,1265.13 532.75,1265.13 535.63,1268.01 535.63,1273.63 538.5,1276.51 544.25,1276.51 547.13,1273.63 547.13,1270.35 550,1267.48 555.75,1267.48 558.63,1270.35 558.63,1272.41 561.5,1275.28 567.25,1275.28 570.13,1272.41 570.13,1269.53 573,1266.65 578.75,1266.65 581.63,1269.53 584.5,1272.4 588.73,1272.4 593.4,1272.4 609,1288 609,1292.13 609,1293.88 606.12,1296.75 599.88,1296.75 597,1299.63 597,1305.38 599.88,1308.25 616.75,1308.25 619.63,1311.13 619.63,1316.88 616.75,1319.75 599.88,1319.75 597,1322.63 597,1328.38 599.88,1331.25 616.75,1331.25 619.63,1334.13 619.63,1339.88 616.75,1342.75 599.88,1342.75 597,1345.63 597,1351.38 599.88,1354.25 616.75,1354.25 619.63,1357.13 619.63,1362.88 616.75,1365.75 599.88,1365.75 597,1368.63 597,1374.38 599.88,1377.25 616.75,1377.25 619.63,1380.13 619.63,1385.88 616.75,1388.75 599.88,1388.75 597,1391.63 597,1397.38 599.88,1400.25 616.75,1400.25 619.63,1403.13 619.63,1408.88 616.75,1411.75 599.88,1411.75 597,1414.63 597,1420.38 599.88,1423.25 616.75,1423.25 619.63,1426.13 619.63,1431.88 616.75,1434.75 599.88,1434.75 597,1437.63 597,1443.38 599.88,1446.25 618.12,1446.25 621,1449.13 621,1454.88 618.12,1457.75 599.88,1457.75 597,1460.63 597,1466.38 599.88,1469.25 606.62,1469.25 617.77,1480.4 623.18,1485.82
  Top Layer w4: 623.18,1485.82 637.37,1500 850.32,1500 v1(864.96,1514.65)
PC13: U13.E3
PC14: U13.C2
PC15: U13.C1
PD2: U13.D12 U22.M5 | length 1089.6
  Top Layer w3.5: U22.M5@404.92,1327.56 ccw(c428.68,1351.32) 412.07,1322.12 ; 412,1322 414.96,1319.04 430.6,1319.04 433.9,1315.74 433.9,1275.79 451.66,1258.02 462.71,1258.02 482.71,1258.02 485.58,1255.15 485.58,1247.26 488.46,1244.38 494.21,1244.38 497.08,1247.26 497.08,1255.26 499.96,1258.13 505.71,1258.13 508.58,1255.26 508.58,1247.26 511.46,1244.38 517.21,1244.38 520.08,1247.26 520.08,1255.26 522.96,1258.13 528.71,1258.13 531.58,1255.26 531.58,1247.26 534.46,1244.38 540.21,1244.38 543.08,1247.26 543.08,1255.26 545.96,1258.13 551.71,1258.13 554.58,1255.26 554.58,1247.26 557.46,1244.38 563.21,1244.38 566.08,1247.26 566.08,1255.15 568.96,1258.02 570.71,1258.02 600.95,1258.02 624.55,1281.61 633.66,1290.72 633.66,1293.99 636.53,1296.86 646.87,1296.86 649.74,1299.74 649.74,1305.49 646.87,1308.36 629.5,1308.36 626.63,1311.24 626.63,1316.99 629.5,1319.86 646.87,1319.86 649.74,1322.74 649.74,1328.49 646.87,1331.36 629.5,1331.36 626.63,1334.24 626.63,1339.99 629.5,1342.86 646.87,1342.86 649.74,1345.74 649.74,1351.49 646.87,1354.36 629.5,1354.36 626.63,1357.24 626.63,1362.99 629.5,1365.86 646.87,1365.86 649.74,1368.74 649.74,1374.49 646.87,1377.36 629.5,1377.36 626.63,1380.24 626.63,1385.99 629.5,1388.86 646.87,1388.86 649.74,1391.74 649.74,1397.49 646.87,1400.36 629.5,1400.36 626.63,1403.24 626.63,1408.99 629.5,1411.86 646.87,1411.86 649.74,1414.74 649.74,1420.49 646.87,1423.36 629.5,1423.36 626.63,1426.24 626.63,1431.99 629.5,1434.86 646.87,1434.86 649.74,1437.74 649.74,1443.49 646.87,1446.36 646.18,1446.36 643.3,1449.24 643.3,1453.3 645.05,1455.05 657,1467 876,1467 882,1473 882,1505 891.65,1514.65 v1(896.46,1514.65)
PD3: R54.2 U12.44 U13.B12 | length 3509.7
  Mid-Layer 2 w4: v1(2909.87,3173.58) 2950,3133.45 v1(2950,2605)
  Mid-Layer 3 w4: v1(833.46,1514.65) 824.77,1514.65 809.36,1530.05 783.21,1530.05 738.71,1574.54 708,1605.26 708,1701.64 708.05,1701.68 708.29,1701.44 708.53,1701.68 708.53,1709.47 738.71,1739.65 819.06,1820 951.79,1952.73 2373.14,1952.73 2755,2334.59 2755,2381 2950,2576 v1(2950,2605)
PD4: R49.2 U12.41 U13.A12 | length 3656.7
  Top Layer w4: R49.2@2900,3305 2900,3274 2956.95,3217.05 2956.95,3083.74 2940.78,3067.58 v1(2909.87,3067.58)
  Mid-Layer 3 w4: v1(801.97,1514.65) 778.51,1514.65 738.71,1554.45 702.72,1590.44 698.53,1594.63 698.53,1705.83 698.53,1717.47 738.71,1757.65 801.06,1820 945.91,1964.85 2367.26,1964.85 2742.27,2339.86 2742.27,2400.27 2839.2,2497.2 2894.57,2552.57 2894.57,3052.28 v1(2909.87,3067.58)
PD5: U12.43 U13.A11 | length 3496
  Mid-Layer 3 w4: v1(801.97,1483.15) 775.47,1483.15 738.71,1519.91 702.72,1555.9 677.24,1581.37 677.24,1705.83 677.24,1726.18 738.71,1787.65 916.89,1965.83 938.89,1987.83 2360.24,1987.83 2721.06,2348.65 2721.06,2977.06 2882.58,3138.58 v1(2909.87,3138.58)
PD6: U12.42 U13.B11 | length 3686.6
  Mid-Layer 3 w4: v1(833.46,1483.15) 817.8,1467.48 767.52,1467.48 738.71,1496.29 702.72,1532.28 665.64,1569.36 665.64,1705.83 665.64,1732.58 738.71,1805.65 898.89,1965.83 930.89,1997.83 2352.24,1997.83 2708.33,2353.92 2708.33,2540.48 2690,2558.82 2690,2963.05 2885.32,3158.37 2922.63,3158.37 2938,3143 2938,3126 2914.58,3102.58 v1(2909.87,3102.58)
PD7: R33.2 U12.16 U13.C11 | length 3518.6
  Mid-Layer 2 w4: v1(2446.13,3031.58) 2530.42,3031.58 2740,2822 v1(2740,2605)
  Mid-Layer 3 w4: v1(864.96,1483.15) 850.86,1497.25 777.19,1497.25 688.05,1586.4 688.05,1705.83 688.05,1722.05 738.71,1772.71 931.83,1965.83 942.22,1976.22 2363.63,1976.22 2731.67,2344.26 2731.67,2596.67 v1(2740,2605)
PD11: FPC2.6 U13.R15 | length 479.9
  Top Layer w4: v1(1232.23,2032) 1235.7,2028.53 FPC2.6@1235.7,1984.27
  Bottom Layer w4: v1(1232.23,2032) 1228.12,2027.88 1228.12,1965.83 1228.12,1623.93 v1(1242.91,1609.13)
PD12: FPC2.4 U13.R16 | length 452.7
  Top Layer w4: FPC2.4@1275.07,1984.27 1275.07,2030.84 v1(1276.23,2032)
  Bottom Layer w4: v1(1242.91,1640.63) 1242.91,1650.26 1252.41,1659.75 ccw(c1242.24,1672.66) 1258.67,1672.66 1258.67,1965.83 1258.67,2014.44 v1(1276.23,2032)
PD13: FPC2.5 U13.R17 | length 412.8
  Top Layer w4: v1(1254.23,2032) 1255.39,2030.84 FPC2.5@1255.39,1984.27
  Bottom Layer w4: v1(1242.91,1672.13) 1242.91,1965.83 1242.91,2020.68 v1(1254.23,2032)
PDR_ON: R5.1 U13.E7 | length 319
  Mid-Layer 4 w4: v1(909.85,1045.65) 912.19,1047.99 912.19,1341.41 v1(927.95,1357.17)
PE2: U3.15 U13.C3 | length 839.8
  Top Layer w4: U3.15@191.86,992.01 192,992.15 v1(192,1033)
  Mid-Layer 2 w4: v1(192,1033) 192,1015 214,993 518.99,993 666.82,1140.83 702.72,1176.73 738.71,1212.72 740.56,1214.56 848.34,1214.56 v1(864.96,1231.18)
PE3: U13.D3
PE4: U3.19 U13.D2 | length 1027.4
  Top Layer w4: v1(68,935) 75.96,927.04 U3.19@146.59,927.04
  Mid-Layer 2 w4: v1@68,934 68,946 104,982 528,982 686.83,1140.83 702.72,1156.72 729.86,1183.86 880.63,1183.86 v1(896.46,1199.68)
PE5: U3.20 U13.D1 | length 980
  Top Layer w4: v1(87,905) 89.35,907.35 U3.20@146.59,907.35
  Mid-Layer 2 w4: v1@86,905 153,972 539.99,972 706.99,1139 738.71,1139 867.27,1139 v1(896.46,1168.19)
PE6: U3.16 U13.E5 | length 1040.6
  Top Layer w4: v1(154,1033) 172.17,1014.83 U3.16@172.17,992.01
  Mid-Layer 3 w4: v1(154,1033) 154,1000 176,978 433.51,978 596.34,1140.83 702.72,1247.2 738.71,1283.2 796.81,1341.29 806.92,1341.29 819.42,1328.79 819.42,1318.58 827,1311 911.13,1311 v1(927.95,1294.17)
PF6: U1.7 U13.K2 | length 772.6
  Top Layer w4: U1.7@747.76,1005 725.22,1005 717.32,1012.9 710.56,1019.66 710.56,1023.9 713.56,1026.9 722.28,1026.9 725.28,1029.9 725.28,1035.9 722.28,1038.9 712.82,1038.9 709.82,1041.9 709.82,1047.9 712.82,1050.9 718.67,1050.9 721.67,1053.9 721.67,1059.9 718.67,1062.9 712.82,1062.9 709.82,1065.9 709.82,1071.9 712.82,1074.9 735.71,1074.9 738.71,1077.9 738.71,1083.9 735.71,1086.9 712.82,1086.9 709.82,1089.9 709.82,1095.9 712.82,1098.9 735.71,1098.9 738.71,1101.9 738.71,1107.9 735.71,1110.9 712.82,1110.9 709.82,1113.9 709.82,1119.9 712.82,1122.9 735.71,1122.9 738.71,1125.9 738.71,1131.9 735.71,1134.9 713,1134.9 710,1137.9 710,1147.34 720.7,1158.04 777.66,1215 1061.34,1215 1076.66,1199.68 U13.K2@1085.43,1199.68
PF7: U1.3 U13.K3 | length 941.6
  Top Layer w4: U1.3@445,955 481,955 504.5,978.5 504.5,1043.53 578.84,1117.86 616.47,1117.86 639.43,1140.83 702.72,1204.11 738.71,1240.1 766.41,1267.81 766.41,1299.37 778.05,1311 1093,1311 1101,1303 1101,1246.75 U13.K3@1085.43,1231.18
PF8: U1.5 U13.K4 | length 749.7
  Top Layer w4: U1.5@747.76,905 730.15,905 688.23,946.92 688.23,1140.83 688.23,1171 702.72,1185.48 738.71,1221.47 796.23,1279 1069.11,1279 U13.K4@1085.43,1262.68
PF9: U1.2 U13.L4 | length 949
  Top Layer w4: U1.2@445,1005 470,1005 486.77,1021.77 486.77,1044.01 574.28,1131.52 613.2,1131.52 622.51,1140.83 702.72,1221.04 738.71,1257.03 751.73,1270.05 751.73,1331.73 761.7,1341.7 963.22,1341.7 978.3,1326.62 1125.38,1326.62 1133,1319 1133,1278.75 U13.L4@1116.93,1262.68
PF10: U1.6 U13.L3 | length 719.2
  Top Layer w4: U1.6@747.76,955 738.71,955 725.36,955 699.82,980.53 699.82,1140.83 699.82,1160.18 786.7,1247.05 1062.95,1247.05 1069.5,1240.5 1069.5,1225.5 1079,1216 1101.75,1216 U13.L3@1116.93,1231.18
PF11: U10_U_SDRAM1.J9 U10_U_SDRAM2.J9 U13.T7 | length 1458.1
  Top Layer w4: U13.T7@1274.41,1357.17 1275.37,1357.17 1291.44,1341.1 1315.66,1341.1 1324.92,1331.84 1327.97,1328.79 1332.22,1328.79 1337.16,1333.73 1343.16,1333.73 1346.16,1330.73 1346.16,1312.73 1349.16,1309.73 1355.16,1309.73 1358.16,1312.73 1358.16,1330.73 1361.16,1333.73 1367.16,1333.73 1370.16,1330.73 1370.16,1312.73 1373.16,1309.73 1379.16,1309.73 1382.16,1312.73 1382.16,1330.73 1385.16,1333.73 1391.16,1333.73 1394.16,1330.73 1394.16,1312.73 1397.16,1309.73 1403.16,1309.73 1406.16,1312.73 1406.16,1330.73 1409.16,1333.73 1415.16,1333.73 1418.16,1330.73 1418.16,1312.73 1421.16,1309.73 1427.16,1309.73 1430.16,1312.73 1430.16,1330.73 1433.16,1333.73 1439.16,1333.73 1442.16,1330.73 1442.16,1312.73 1445.16,1309.73 1451.16,1309.73 1454.16,1312.73 1454.16,1330.73 1457.16,1333.73 1463.16,1333.73 1466.16,1330.73 1466.16,1312.92 1469.16,1309.92 1483.43,1309.92 1604.58,1309.92 1609.27,1314.61 1610.68,1316.02 1610.68,1320.27 1610.17,1320.78 1610.17,1325.02 1614.41,1329.26 1618.66,1329.26 1631.38,1316.53 1635.63,1316.53 1639.87,1320.78 1639.87,1325.02 1627.14,1337.75 1627.14,1341.99 1631.38,1346.23 1635.63,1346.23 1648.35,1333.51 1652.6,1333.51 1656.84,1337.75 1656.84,1341.99 1644.11,1354.72 1644.11,1358.96 1648.35,1363.2 1652.6,1363.2 1662.91,1352.89 1667.15,1352.89 1671.39,1357.13 1671.39,1361.38 1662.18,1370.59 1662.18,1379.41 1662.18,1379.8 1662.18,1381.8 1659.18,1384.8 1655.78,1384.8 1652.78,1387.8 1652.78,1393.8 1655.78,1396.8 1665.98,1396.8 1668.98,1399.8 1668.98,1405.8 1665.98,1408.8 1658.5,1408.8 1655.5,1411.8 1655.5,1417.8 1658.5,1420.8 1661.59,1420.8 1670.64,1429.86 1676.69,1435.91 1727.17,1435.91 1736.02,1427.05 1736.02,1372.9 v1(1751.76,1357.16)
  Bottom Layer w4: v1(1751.76,1357.16) 1751.84,1357.09 1868.98,1357.09 1881.23,1344.83 1980.77,1344.83 1981.21,1345.28 2068.23,1345.28 2099.74,1376.79 2155.11,1376.79 2170.94,1360.97 v1(2170.94,1359.99)
PG6: R1.2 U1.1 U13.G15 | length 988.6
  Top Layer w4: R1.2@385,1065 395,1055 U1.1@445,1055 479.17,1055 565,1140.83 566.53,1142.36 605.56,1142.36 702.72,1239.51 738.71,1275.5 740.07,1276.86 740.07,1346.52 766.81,1373.26 939.68,1373.26 948,1381.58 948,1502.9 975.1,1530 975.1,1593.29 U13.G15@990.95,1609.13
PG7: U12.13 U13.F16 | length 3099.9
  Bottom Layer w4: v1(959.45,1640.63) 975.02,1656.2 975.02,1956.47 1136.71,2118.16 1141.65,2118.16 1146.49,2123 1531.39,2123 1600.39,2192 1851.14,2192 1917.3,2125.84 2347.35,2125.84 2417.48,2195.98 2417.73,2195.98 2617.81,2396.05 2617.81,3110.85 2590.08,3138.58 v1(2446.13,3138.58)